# Altium PCB KF01A-D.PcbDoc
Units mm, origin at the board's own origin, x right, y up, seen from the top; angles counter-clockwise.
Board outline 361.19 x 228.47 mm, 2 copper layers (Top Layer, Bottom Layer); 105 components, 48 nets, 423 pads, 0 vias.
Unrouted connection lines stored in the file: 62.
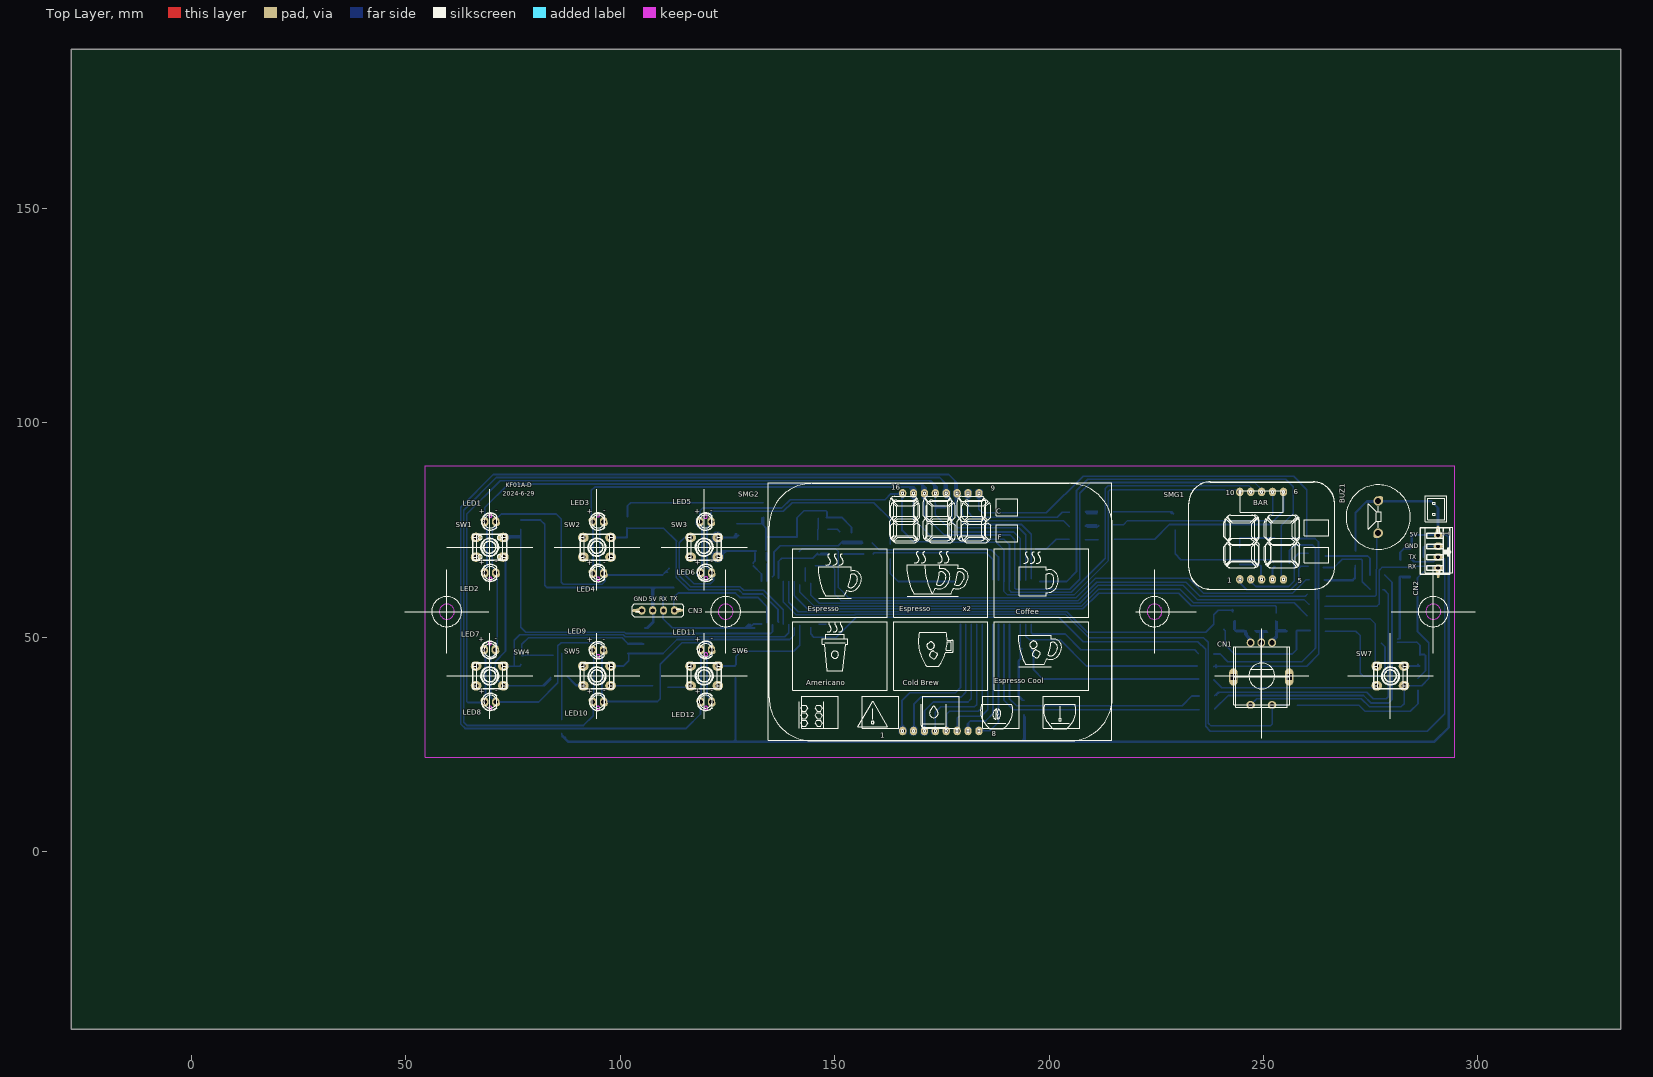
[diagram p0: Top Layer view]
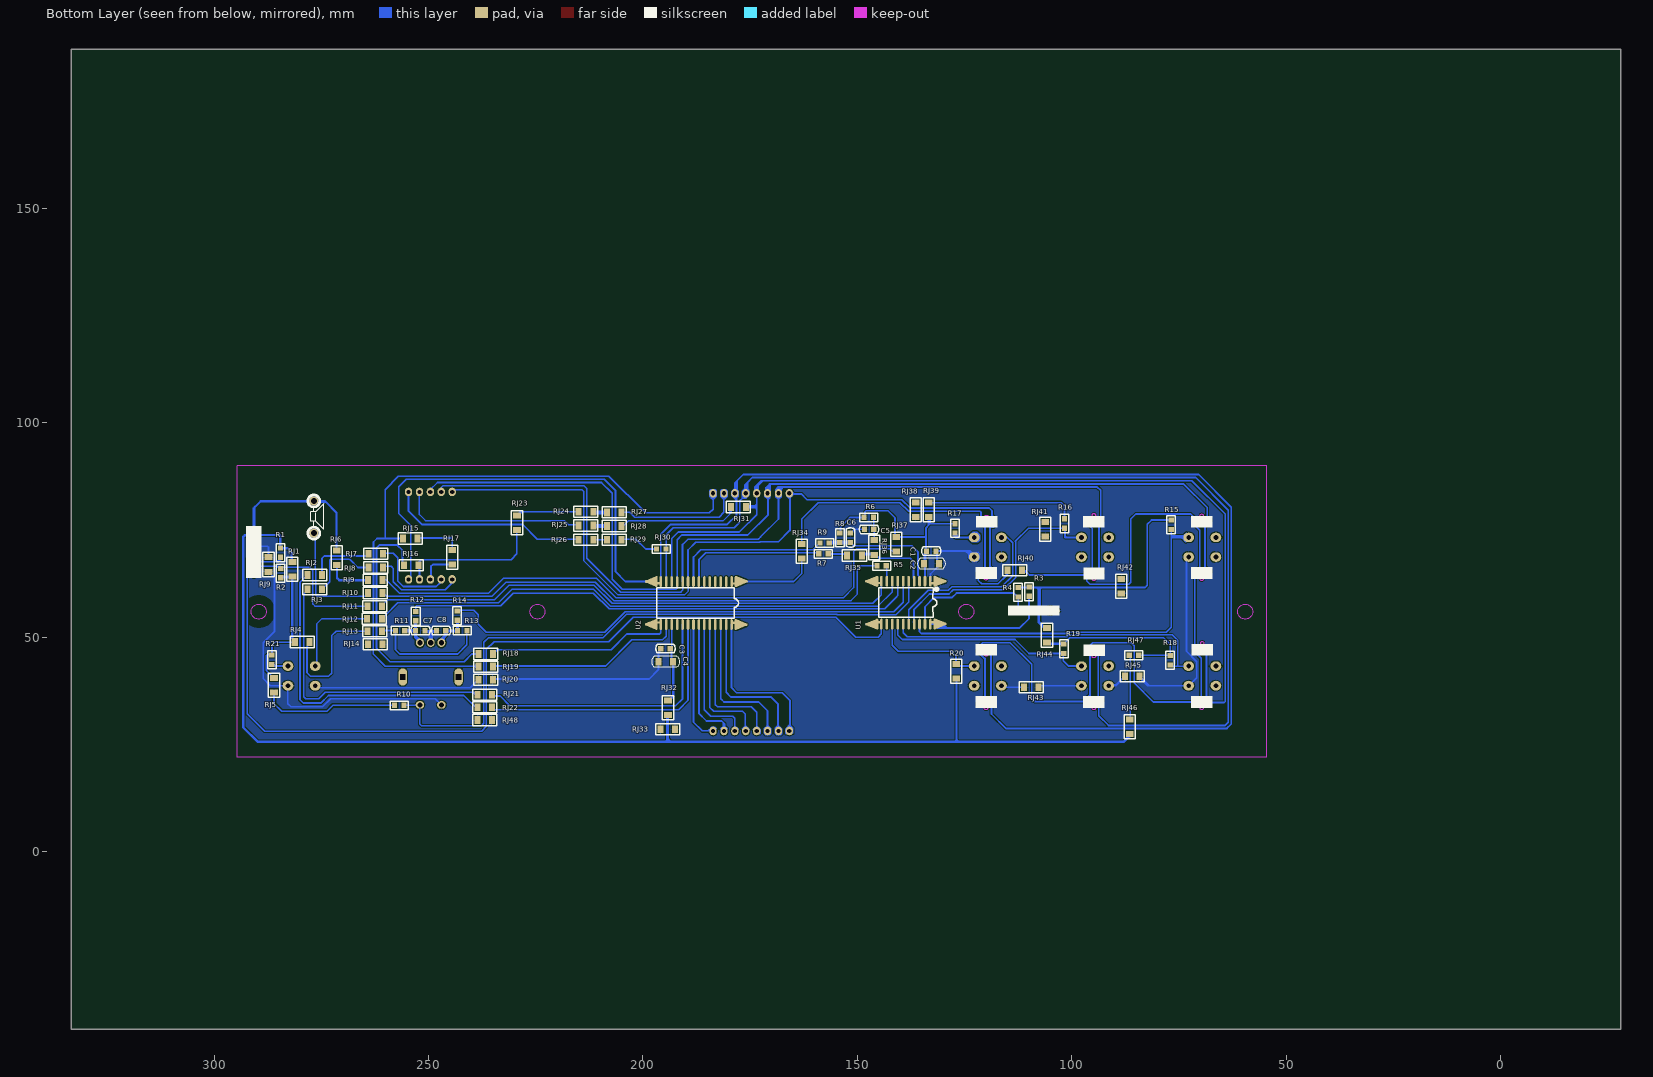
[diagram p1: Bottom Layer view, seen from below]

## Layer stack, top to bottom
Top Solder: solder mask 0.0102, Solder Resist, Dk 3.5
Top Layer: signal copper 0.0356
Dielectric 1: dielectric 0.32, FR-4, Dk 4.8
Bottom Layer: signal copper 0.0356
Bottom Solder: solder mask 0.0102, Solder Resist, Dk 3.5

## Board outline
-27.94,-41.402 333.248,-41.402 333.248,187.071 -27.94,187.071

## Design rules (kind name [scope] priority, off if disabled: settings)
Clearance [All] p1: gap=0.3
PolygonConnect [All] p1: connectstyle=Relief reliefconductorwidth=0.254 reliefentries=4 polygonreliefangle="90 Angle" airgapwidth=0.254
RoutingVias [All] p1: holewidth=0.711 width=1.27 viastyle="Through Hole" minholewidth=0.711 minwidth=1.27 maxholewidth=0.711 maxwidth=1.27
SolderMaskExpansion [All] p1: expansion=0.102
Width [All] p1: maxlimit=2 minlimit=0.3 preferedwidth=0.4 minimp=50.000000 maximp=50.000000 favimp=50.000000
30 further rules are at their usual default settings.

## Classes and differential pairs
component class KF01A-D: BUZ1 C1 C2 C3 C4 C5 C6 C7 CN1 CN2 CN3 LED1 LED2 LED3 LED4 LED5 LED6 LED7 LED8 LED9 LED10 LED11 LED12 R1 R2 R3 R4 R5 R6 R7 R8 R9 R10 R11 R12 R13 R14 R15 R16 R17 R18 R19 R21 SMG1 SMG2 SW1 SW2 SW3 SW4 SW5 SW6 SW7 U1 U2

## Components (designator, comment, footprint, x,y, rotation, side; value= is the part's Value field where it differs from the comment)
BUZ1 "" BUZ-7.5-15-AI 276.733,74.295 r90 top
C1 "104" c0805 131.658,70.103 r0 bottom
C2 "10UF" c1206 132.715,67.183 r0 bottom
C3 "104" c0805 193.634,47.37 r0 bottom
C4 "10UF" c1206 194.691,44.323 r0 bottom
C5 "101" c0805 146.177,75.184 r0 bottom
C6 "101" c0805 151.638,72.136 r90 bottom
C7 "104" c0805 252.984,51.562 r180 bottom
C8 "104" c0805 248.158,51.562 r180 bottom
CN1 "编码器" 编码器 250.19,43.688 r0 top
CN2 "" CN-2.54-4-X 290.703,66.167 r90 top
CN3 "" CN-2.54-4-P 108.697,55.997 r0 top
LED1 "3MM白光" led3#1 68.453,76.962 r0 top
LED2 "3MM白光" led3#2 69.723,65.024 r0 top
LED3 "3MM白光" led3#2 94.869,76.962 r0 top
LED4 "3MM白光" led3#2 94.868,64.897 r0 top
LED5 "3MM白光" led3#2 119.887,76.962 r0 top
LED6 "3MM白光" led3#2 120.014,65.024 r0 top
LED7 "3MM白光" led3#2 69.595,47.117 r0 top
LED8 "3MM白光" led3#2 69.722,34.925 r0 top
LED9 "3MM白光" led3#2 94.82,46.99 r0 top
LED10 "3MM白光" led3#2 94.869,34.925 r0 top
LED11 "3MM白光" led3#2 120.015,47.117 r0 top
LED12 "3MM白光" led3#2 120.015,34.925 r0 top
R1 "10K" R0805 284.48,69.85 r90 bottom
R2 "10K" R0805 284.48,64.897 r270 bottom
R3 "10K" R0805 109.982,60.579 r270 bottom
R4 "10K" R0805 112.522,60.452 r270 bottom
R5 "100R" R0805 144.272,66.675 r180 bottom
R6 "10K" R0805 147.447,77.978 r0 bottom
R7 "1K" R0805 157.988,69.469 r0 bottom
R8 "10K" R0805 154.051,73.279 r90 bottom
R9 "1K" R0805 157.734,72.009 r0 bottom
R10 "10K" R0805 256.921,34.163 r0 bottom
R11 "4.7K" R0805 256.54,51.562 r180 bottom
R12 "1K" R0805 252.984,54.864 r270 bottom
R13 "4.7K" R0805 242.062,51.562 r180 bottom
R14 "1K" R0805 243.35,54.99 r270 bottom
R15 "10K" R0805 76.853,76.158 r270 bottom
R16 "10K" R0805 101.727,76.454 r270 bottom
R17 "10K" R0805 127.254,75.311 r270 bottom
R18 "10K" R0805 77.089,44.577 r270 bottom
R19 "10K" R0805 101.854,47.244 r270 bottom
R20 "0R" r1206 126.975,40.375 r90 bottom
R21 "10K" R0805 286.512,44.704 r270 bottom
RJ1 "0R" r1206 281.725,64.135 r90 bottom
RJ2 "0R" r1206 274.828,64.516 r0 bottom
RJ3 "0R" r1206 278.228,61.214 r180 bottom
RJ4 "0R" r1206 277.778,48.895 r0 bottom
RJ5 "0R" r1206 286.004,37.084 r90 bottom
RJ6 "0R" r1206 271.399,70.231 r270 bottom
RJ7 "0R" r1206 260.604,69.469 r0 bottom
RJ8 "0R" r1206 260.604,66.294 r0 bottom
RJ9 "0R" r1206 287.313,65.278 r90 bottom
RJ9 "0R" r1206 260.731,63.373 r0 bottom
RJ10 "0R" r1206 260.731,60.325 r0 bottom
RJ11 "0R" r1206 260.858,57.277 r0 bottom
RJ12 "0R" r1206 260.887,54.356 r0 bottom
RJ13 "0R" r1206 260.858,51.435 r0 bottom
RJ14 "0R" r1206 264.131,48.387 r180 bottom
RJ15 "0R" r1206 255.905,73.025 r180 bottom
RJ16 "0R" r1206 252.349,66.802 r0 bottom
RJ17 "0R" r1206 244.475,70.358 r270 bottom
RJ18 "0R" r1206 238.379,46.101 r180 bottom
RJ19 "0R" r1206 238.379,43.18 r180 bottom
RJ20 "0R" r1206 238.379,40.132 r180 bottom
RJ21 "0R" r1206 238.55,36.625 r180 bottom
RJ22 "0R" r1206 238.625,33.675 r180 bottom
RJ23 "0R" r1206 229.362,75.057 r90 bottom
RJ24 "0R" r1206 214.982,79.248 r180 bottom
RJ25 "0R" r1206 214.982,76.073 r180 bottom
RJ26 "0R" r1206 214.982,72.771 r180 bottom
RJ27 "0R" r1206 208.378,79.121 r180 bottom
RJ28 "0R" r1206 208.407,75.946 r180 bottom
RJ29 "0R" r1206 208.407,72.771 r180 bottom
RJ30 "1K" R0805 195.834,70.612 r0 bottom (schematic designator R14)
RJ31 "0R" r1206 179.422,80.391 r180 bottom
RJ32 "0R" r1206 194.144,35.306 r270 bottom
RJ33 "0R" r1206 192.532,28.536 r0 bottom
RJ34 "0R" r1206 162.941,68.326 r90 bottom
RJ35 "0R" r1206 148.971,69.088 r0 bottom
RJ36 "0R" r1206 146.05,72.644 r270 bottom
RJ37 "0R" r1206 140.97,69.977 r90 bottom
RJ38 "0R" r1206 136.398,78.007 r90 bottom
RJ39 "0R" r1206 133.35,78.007 r90 bottom
RJ40 "0R" r1206 111.633,65.659 r0 bottom
RJ41 "0R" r1206 106.172,76.933 r270 bottom
RJ42 "0R" r1206 88.475,63.625 r270 bottom
RJ43 "0R" r1206 111.125,38.354 r180 bottom
RJ44 "0R" r1206 105.791,48.768 r90 bottom
RJ45 "0R" r1206 84.201,40.894 r0 bottom
RJ46 "0R" r1206 86.487,30.861 r270 bottom
RJ47 "10K" R0805 85.598,45.847 r0 bottom (schematic designator R18)
RJ48 "0R" r1206 238.608,30.713 r180 bottom
SMG1 "8,8" TH34251AW1-1 244.48,83.889 r0 top
SMG2 "TH80602AWR2-1" TH80602AWR2-1 165.877,83.566 r0 top
SW1 "" KEY-4/4 69.584,71.004 r0 top
SW2 "" KEY-4/4 94.584,71.004 r0 top
SW3 "" KEY-4/4 119.584,71.004 r0 top
SW4 "" KEY-4/4 69.584,41.004 r0 top
SW5 "" KEY-4/4 94.584,41.004 r0 top
SW6 "" KEY-4/4 119.584,41.004 r0 top
SW7 "" KEY-4/4 279.584,41.004 r0 top
U1 "OB38R08T1W20SP" SOP20 132.969,63.086 r0 bottom
U2 "AIP1640" SOP28 179.322,62.996 r0 bottom

## Footprints (in the part's own frame and the unit in brackets; to place one, negate y for a bottom-side part, rotate by r counter-clockwise, add the part's x,y. Pads: shape width x height; smd on the part's side, far side on the other; paste and mask are expansions set on the pad)
BUZ-7.5-15-AI [mm]
  oval 1.3x1.5 all layers, no hole rot 45: 1(-0.44,0.424) 2(7.94,-0.424)
  round 2.2 hole 1.4: 1(0,0) 2(7.5,0)
  silkscreen extent -3.75,-7.5 11.25,7.5
c0805 [mm]
  rect 1.2x1.27 smd: 1(0,0) 2(2.2,-0.001)
  silkscreen extent -1.13,-1 3.37,1
c1206 [mm]
  rect 1.4x1.8 smd: 1(-1.7,0) 2(1.7,0)
  silkscreen extent -3.16,-1.3 3.17,1.3
CN-2.54-4-P [mm]
  oval 1.7x2 hole 1: 1(3.952,0.264) 2(1.412,0.264) 3(-1.128,0.264) 4(-3.668,0.264)
  oval 2.5x0.6 all layers, no hole: 1(4.953,0.28) 4(-4.658,0.247)
  oval 0.6x2.2 all layers, no hole rot 102: 1(5.128,0.095) 4(-4.833,0.432)
  oval 0.6x2.2 all layers, no hole rot 78: 1(5.13,0.469) 4(-4.835,0.058)
  silkscreen extent -5.87,-1.26 6.15,1.78
CN-2.54-4-X [mm]
  oval 1.7x2 hole 1: 1(7.62,0) 4(0,0)
  oval 2.5x0.6 all layers, no hole: 1(8.59,0.016) 4(-1.09,-0.016)
  oval 0.6x2.2 all layers, no hole rot 102: 1(8.765,-0.168) 4(-1.265,0.168)
  oval 0.6x2.2 all layers, no hole rot 78: 1(8.767,0.206) 4(-1.267,-0.206)
  oval 1.7x2.2 hole 1: 2(5.08,0) 3(2.54,0)
  oval 2x2.5 on Top Overlay: 4(0,0)
  silkscreen extent -1.5,-2.97 9.34,4.12
KEY-4/4 [mm]
  oval 2.5x2.2 hole 1.1: 1(-3.175,2.286) 1(3.175,2.286) 2(-3.175,-2.286) 2(3.175,-2.286)
  round 3.2 on Bottom Overlay: 1(-3.175,2.286) 1(3.175,2.286) 2(-3.175,-2.286) 2(3.175,-2.286)
  silkscreen extent -3.94,-3.05 3.94,3.05
led3#1 [mm]
  round 1.3 all layers, no hole: A(-0.333,0.381) K(2.87,-0.381)
  oval 1.7x2.2 hole 1.1: A(0,0) K(2.54,0)
  silkscreen extent -0.73,-2 2.78,2
led3#2 [mm]
  round 1.3 all layers, no hole: A(-1.602,0.381) K(1.602,-0.381)
  oval 1.7x2.2 hole 1.1: A(-1.269,0) K(1.271,0)
  silkscreen extent -2,-2 1.51,2
R0805 [mm]
  rect 1.2x1.27 smd: 1(-1.185,0.018) 2(1.015,0.018)
  silkscreen extent -2.18,-0.98 2.01,1.02
r1206 [mm]
  rect 1.4x1.8 smd: 1(0,0) 2(3.4,0)
  silkscreen extent -1.1,-1.3 4.5,1.3
SOP20 [mm]
  oval 0.6x1 smd: 1(-2.45,-0.01) 1(-1.958,0.011) 10(13.388,-0.011) 10(13.94,0.06) 11(13.388,9.989) 11(13.89,10.02) 20(-2.55,10.01) 20(-1.958,10.011)
  oval 3.2x0.6 smd rot 158: 1(-2.24,-0.45) 10(13.688,0.529) 11(13.688,10.529) 20(-2.258,9.471)
  oval 3.2x0.6 smd rot 22: 1(-2.24,0.52) 10(13.708,-0.471) 11(13.708,9.529) 20(-2.278,10.471)
  oval 0.6x1.8 smd: 1(-1.478,-0.009) 10(12.908,0.009) 11(12.908,10.009) 20(-1.478,9.991)
  oval 2.8x0.5 smd: 1(-1.14,0.47) 10(12.56,0.46) 11(12.57,9.57) 20(-1.18,9.56)
  oval 0.6x2.5 smd: 1(-1.008,0) 1(0,0) 2(1.27,0) 3(2.54,0) 4(3.81,0) 5(5.08,0) 6(6.35,0) 7(7.62,0) 8(8.89,0) 9(10.16,0) 10(11.43,0) 10(12.438,0) 11(11.43,10) 11(12.438,10) 12(10.16,10) 13(8.89,10) 14(7.62,10) 15(6.35,10) 16(5.08,10) 17(3.81,10) 18(2.54,10) 19(1.27,10) 20(-1.008,10) 20(0,10)
  silkscreen extent -1.57,1.56 12,8.45
SOP28 [mm]
  round 1.5 on Bottom Overlay: 0(-1.572,1.996)
  oval 0.6x1 smd: 1(-2.458,0.011) 1(-1.958,0.011) 14(18.482,-0.018) 14(19.015,-0.049) 15(18.476,9.968) 15(19.019,10.007) 28(-2.408,10.061) 28(-1.946,10.015)
  oval 3.2x0.6 smd rot 22: 1(-2.278,0.471) 14(18.735,-0.509) 15(18.739,9.507) 28(-2.218,10.501)
  oval 3.2x0.6 smd rot 158: 1(-2.258,-0.529) 14(18.735,0.461) 15(18.729,10.467) 28(-2.208,9.541)
  oval 0.6x1.8 smd: 1(-1.478,-0.009) 14(18.002,0.002) 15(17.996,9.989) 28(-1.466,9.995)
  oval 2.8x0.5 smd: 1(-1.218,0.421) 14(17.645,0.401) 15(17.629,9.567) 28(-1.138,9.581)
  oval 0.6x2.5 smd: 1(-1.008,0) 1(0,0) 2(1.272,0.004) 3(2.542,0.004) 4(3.812,0.004) 5(5.082,0.004) 6(6.352,0.004) 7(7.622,0.004) 8(8.892,0.004) 9(10.162,0.004) 10(11.432,0.004) 11(12.702,0.004) 12(13.972,0.004) 13(15.242,0.004) 14(16.512,-0.005) 14(17.532,-0.007) 15(16.512,10.004) 15(17.526,9.98) 16(15.242,10.004) 17(13.972,10.004) 18(12.702,10.004) 19(11.432,10.004) 20(10.162,10.004) 21(8.892,10.004) 22(7.622,10.004) 23(6.352,10.004) 24(5.082,10.004) 25(3.812,10.004) 26(2.542,10.004) 27(1.272,10.004) 28(-0.996,10.004) 28(0.008,10.011)
  silkscreen extent -1.63,1.41 17.47,8.6
TH34251AW1-1 [mm]
  oval 1.7x2 hole 1: 1(-0.005,-20.389) 2(2.535,-20.389) 3(5.075,-20.389) 4(7.615,-20.389) 5(10.155,-20.389) 6(10.155,0.011) 7(7.615,0.011) 8(5.075,0.011) 9(2.535,0.011) 10(-0.005,0.011)
  silkscreen extent -11.93,-22.69 22.07,2.31
TH80602AWR2-1 [mm]
  oval 1.7x2 hole 1: 1(-0.015,-55.4) 2(2.525,-55.4) 3(5.065,-55.4) 4(7.605,-55.4) 5(10.145,-55.4) 6(12.685,-55.4) 7(15.225,-55.4) 8(17.765,-55.4) 9(17.765,0) 10(15.225,0) 11(12.685,0) 12(10.145,0) 13(7.605,0) 14(5.065,0) 15(2.525,0) 16(-0.015,0)
  silkscreen extent -31.12,-57.7 48.88,2.3
编码器 [mm]
  oval 2x4 hole 1.2 square: 0(-7.204,-2.937) 0(5.796,-2.937)
  oval 2x1.8 hole 1.2: 1(1.796,-9.437) 2(-3.204,-9.437)
  oval 1.8x2 hole 1.2: 3(1.796,5.063) 4(-0.704,5.063) 5(-3.204,5.063)
  silkscreen extent -7.19,-9.94 5.8,5.06

## Part data
BUZ1: library part BUZ, "BUZ"
C1 C2 C3 C4 C5 C6 C7 C8: library part C, "CAP"
CN1: library part CN5, "CN5"
CN2 CN3: library part CN4, "CN4"
LED1 LED2 LED3 LED4 LED5 LED6 LED7 LED8 LED9 LED10 LED11 LED12: library part DL, "LED"
R1 R2 R3 R4 R5 R6 R7 R8 R9 R10 R11 R12 R13 R14 R15 R16 R17 R18 R19 R21 RJ30 RJ47: library part R, "RES"
SW1 SW2 SW3 SW4 SW5 SW6 SW7: library part KQ, "KEY"
U1: library part IC-20
U2: library part TM1628

## Nets (pads, with @x,y where several pads share a name; then routed paths per layer and width w, separated by ;. In a path a pad name is that pad's centre, name@x,y a point inside that pad or via, vN(x,y) a via of type N, cw(c..) or ccw(c..) an arc to the next point about the centre after c; other vN are vias at no path point)
+5V: BUZ1.2 C1.2 C2.2 C3.1 C4.1 CN2.1 CN3.3 R1.2 R2.2 R3.1 R4.1 R6.2 R8.2 R10.2 R11.1 R13.2 R15.1 R16.1 R17.1 R18.1 R19.1 R20.1 R21.1 RJ1.1 RJ1.2 RJ4.1 RJ4.2 RJ5.1 RJ5.2 RJ6.1 RJ6.2 RJ9.1@260.731,63.373 RJ9.2@264.131,63.373 RJ13.1 RJ13.2 RJ32.1 RJ32.2 RJ37.1 RJ37.2 RJ39.1 RJ39.2 RJ44.1 RJ44.2 RJ46.1 RJ46.2 RJ47.1 RJ47.2 U1.2 U2.17 | length 1208
  Bottom Layer w0.35: RJ46.2@86.425,26.875 87.725,25.575 289.95,25.575 293.275,28.9 293.275,73.525 292.886,73.914 290.957,73.914 290.703,73.914 CN2.1@289.843,73.914 ; RJ37.1@141.732,69.977 142.367,70.612 150.241,70.612 150.876,69.977 150.876,61.595 153.244,59.227 206.293,59.227 210.82,63.754 232.537,63.754 235.966,60.325 256.794,60.325 259.842,63.373 RJ9.1@260.604,63.373 ; RJ9.2@264.541,63.246 270.891,63.246 271.399,63.754 RJ6.2 ; RJ6.1 271.399,79.121 273.826,81.548 ; RJ6.1@271.525,70.1 271.525,79.05 274.023,81.548 ; 273.975,81.725 274.003,81.725 ; BUZ1.2@276.373,81.548 274.225,81.548 274.023,81.548 ; BUZ1.2@276.733,81.788 289.179,81.788 290.446,80.521 ; BUZ1.2@276.733,81.795 274.073,81.795 274.003,81.725 ; BUZ1.2@277.062,81.588 289.163,81.588 ; RJ4.2 285.75,48.895 ; RJ1.2@281.813,68.072 281.813,69.85 282.638,70.675 ; RJ1.2@281.94,67.945 281.94,69.85 282.765,70.675 ; R1.2@284.289,70.675 282.765,70.675 ; R1.2@284.48,71.12 284.48,73.406 ; R1.2 282.828,70.865 282.638,70.675 ; R1.2@284.671,71.183 284.671,73.596 ; 284.734,73.406 285.115,73.787 ; CN2.1@290.446,75.054 290.446,80.321 ; CN2.1@290.576,73.787 285.115,73.787 ; CN2.1@290.687,74.757 CN2.1@289.843,73.914 ; CN2.1@290.708,75.317 290.708,80.259 ; CN2.1@290.871,74.932 290.871,80.096 290.708,80.259 ; 273.826,81.548 274.023,81.548 ; 273.826,81.548 274.003,81.725 ; 274.003,81.725 289.025,81.725 289.163,81.588 ; 282.638,70.675 282.765,70.675 ; 284.48,73.406 284.48,73.787 284.607,73.914 285.242,73.914 ; 284.48,73.406 284.671,73.596 ; 284.671,73.596 284.861,73.787 285.115,73.787 ; 285.115,73.787 285.242,73.914 ; 285.242,73.914 CN2.1@289.843,73.914 ; 289.163,81.588 290.429,80.321 290.446,80.321 ; 290.446,80.321 290.446,80.521 ; 290.446,80.321 290.646,80.321 ; 290.446,80.521 290.646,80.321 ; 290.646,80.321 290.708,80.259
  Bottom Layer w0.4: R15.1 81.407,77.343 82.423,76.327 82.423,62.103 82.931,61.595 107.061,61.595 ; R18.1@77.428,45.762 R18.1 R18.1@77.071,45.829 ; RJ47.1 R18.1@77.071,45.829 ; RJ46.2@86.36,27.559 86.36,27.305 87.245,26.42 ; RJ46.1@86.36,30.861 RJ47.2@86.36,46.228 ; RJ46.2@87.05,26.8 87.245,26.605 87.245,26.42 ; R19.1@101.6,48.768 100.457,49.911 78.613,49.911 77.071,48.369 R18.1@77.071,45.829 ; R16.1@101.727,78.105 101.727,80.645 102.489,81.407 RJ39.2 ; R19.1 R19.1@101.896,48.429 ; RJ44.1@105.156,48.641 102.108,48.641 R19.1@101.896,48.429 ; RJ44.1@105.452,48.429 R19.1@101.896,48.429 ; RJ44.2 106.543,52.168 107.85,53.475 107.85,61.25 108.175,61.575 ; RJ44.2@106.299,52.324 107.569,53.594 CN3.3 ; CN3.3@107.442,56.642 107.442,61.214 ; 107.442,61.468 107.442,61.214 ; CN3.3@107.696,57.171 107.696,61.468 ; R4.1 112.462,61.595 107.696,61.595 ; R20.1@126.873,40.575 126.873,26.162 ; R17.1 133.054,76.496 ; RJ39.1@133.054,77.809 133.054,76.496 ; RJ39.1@133.413,77.915 133.413,76.136 ; C1.2@133.985,70.358 133.985,75.565 133.413,76.136 ; 134.141,73.377 141.238,73.377 141.238,77.865 142.875,79.502 147.955,79.502 148.209,79.248 R6.2@148.209,77.978 ; U1.2 C2.2@134.239,67.183 ; C2.2 C2.2@134.415,67.642 ; R6.2@148.081,77.96 R6.2 151.656,77.96 153.924,75.692 R8.2@153.924,74.422 ; C4.1@192.825,44.475 192.825,36.2 193.719,35.306 RJ32.1 ; C4.1 192.991,44.766 193.25,45.025 C3.1@193.25,47.125 ; C4.1@193.04,44.069 193.04,36.322 RJ32.1@193.675,35.687 ; C3.1@193.294,47.752 U2.17 ; C4.1@193.421,44.831 193.421,47.157 C3.1 ; RJ32.2 194.144,26.289 ; RJ32.2@194.437,31.463 194.437,26.035 ; R13.2@240.793,51.816 241.046,51.563 241.046,48.26 243.205,46.101 256.667,46.101 257.683,47.117 R11.1@257.683,51.562 ; R11.1 RJ13.1@260.84,51.58 ; R10.2 272.27,34.145 273.649,32.766 284.226,32.766 286.004,34.544 RJ5.1 RJ5.1@286.004,37.592 ; RJ9.2@264.131,63.373 270.723,63.373 271.275,63.925 RJ6.2@271.275,66.175 ; RJ13.2@264.385,51.435 271.526,51.435 272.542,50.419 272.542,41.656 273.304,40.894 277.495,40.894 278.319,41.718 278.319,47.817 RJ4.1@277.495,48.641 ; RJ4.2@281.305,49.53 281.725,49.95 ; RJ4.2@281.725,49.696 281.725,49.95 ; RJ4.2@281.813,49.657 RJ1.1@281.813,64.135 ; RJ1.1@281.813,64.164 R2.2@284.197,64.164 ; R2.2@284.226,63.881 282.448,63.881 282.194,64.135 RJ1.1@281.813,64.135 ; 285.75,48.895 286.494,48.151 R21.1 ; RJ5.2 287.782,42.262 287.782,45.72 287.528,45.974 R21.1@286.639,45.974 ; CN2.1@290.718,74.153 290.957,73.914 291.084,73.787 292.608,73.787 293.116,73.279 293.116,29.083 289.814,25.781 194.691,25.781 ; 87.245,26.42 87.884,25.781 126.492,25.781 ; 107.061,61.595 107.442,61.214 ; 107.061,61.595 107.696,61.595 ; 107.442,61.214 107.696,61.468 ; 107.696,61.468 107.696,61.595 ; 126.492,25.781 126.873,26.162 ; 126.492,25.781 126.873,25.781 ; 126.873,25.781 126.873,26.162 ; 126.873,25.781 127.254,25.781 ; 126.873,26.162 127.254,25.781 ; 127.254,25.781 193.548,25.781 ; 133.054,76.496 133.413,76.136 ; C2.2@134.415,67.642 134.112,67.945 134.112,69.85 134.415,69.547 C2.2@134.415,67.642 ; 193.548,25.781 193.802,26.035 ; 193.548,25.781 194.691,25.781 ; 193.802,26.035 194.144,26.035 ; 193.802,26.035 194.056,26.289 194.144,26.289 ; 194.144,26.035 194.144,26.289 ; 194.144,26.035 194.437,26.035 ; 194.144,26.289 194.183,26.289 194.437,26.035 ; 194.437,26.035 194.691,25.781 ; 281.725,49.95 RJ1.1 RJ1.1@281.813,64.135
A: R14.1 U1.6 | length 115.8
  Bottom Layer w0.3: U1.6 139.319,58.166 141.478,56.007 154.499,56.007 154.534,55.972 154.559,55.997 204.094,55.997 208.91,51.181 236.474,51.181 238.379,53.086 238.379,55.245 239.395,56.261 242.57,56.261 ; R14.1@242.824,56.515 242.57,56.261 ; R14.1@242.951,56.007 242.824,56.007 242.57,56.261 ; R14.1@243.078,56.261 242.57,56.261
B: R12.1 U1.7 | length 121.3
  Bottom Layer w0.3: 140.589,59.69 U1.7 ; 140.653,59.627 143.672,56.607 207.864,56.607 ; 207.899,56.642 211.582,60.325 230.251,60.325 233.172,57.404 252.73,57.404 252.984,57.15 R12.1@252.984,55.626
BUZ: R5.2 U1.9 | length 3.1
  Bottom Layer w0.4: U1.9 R5.2@143.129,66.167
COM1: RJ3.1 RJ3.2 RJ8.1 RJ8.2 RJ21.1 RJ21.2 SMG1.1 U2.19 | length 169.4
  Bottom Layer w0.4: U2.19 190.754,35.687 192.405,34.036 231.013,34.036 233.299,36.322 RJ21.2@234.95,36.322 ; RJ21.1@238.633,36.449 239.395,37.211 239.649,37.211 ; RJ21.1@239.014,36.576 239.649,37.211 ; SMG1.1@244.348,62.865 246.126,61.087 256.286,61.087 258.191,62.992 258.191,66.04 258.699,66.548 RJ8.1@260.35,66.548 ; RJ8.2 266.446,66.294 268.351,68.199 272.796,68.199 273.05,67.945 273.05,62.992 RJ3.2 ; RJ3.1@277.876,61.087 278.13,61.087 279.1,60.117 279.1,36.149 278.638,35.687 275.59,35.687 274.066,37.211 239.649,37.211
COM2: RJ2.1 RJ2.2 RJ7.1 RJ7.2 RJ22.1 RJ22.2 SMG1.2 U2.20 | length 172.1
  Bottom Layer w0.4: U2.20 189.484,35.306 191.643,33.147 RJ22.2@234.95,33.147 ; RJ22.1@238.633,33.313 241.769,36.449 273.304,36.449 275.082,34.671 279.146,34.671 279.975,35.5 279.975,47.785 279.978,47.788 279.978,50.002 279.975,50.005 279.975,62.798 RJ2.2@278.257,64.516 ; SMG1.2@247.142,62.865 248.158,61.849 255.905,61.849 257.175,63.119 257.175,68.58 258.191,69.596 RJ7.1@260.35,69.596 ; RJ7.2@264.414,68.961 274.32,68.961 274.828,68.453 RJ2.1
COM3: SMG2.1 U2.28 | length 41.1
  Bottom Layer w0.4: SMG2.1@165.1,27.686 165.1,28.829 165.735,29.464 ; SMG2.1@165.735,28.194 165.735,29.464 ; 166.624,27.559 166.624,28.702 165.735,29.591 ; U2.28@179.33,52.985 179.33,38.233 178.181,37.084 167.513,37.084 165.735,35.306 165.735,29.591 ; 165.735,29.464 165.735,29.591
COM4: SMG2.2 U2.27 | length 40.8
  Bottom Layer w0.4: SMG2.2@168.529,28.575 168.529,29.464 ; 168.656,29.337 169.164,28.829 169.164,27.686 168.783,27.305 167.894,27.305 167.64,27.559 167.64,28.575 168.529,29.464 ; U2.27 180.594,37.211 179.451,36.068 170.053,36.068 168.529,34.544 168.529,29.464
COM5: SMG2.3 U2.26 | length 39.5
  Bottom Layer w0.4: SMG2.3@170.942,28.702 170.942,29.464 ; 171.069,29.337 171.704,28.702 171.704,27.686 171.323,27.305 170.434,27.305 170.18,27.559 170.18,28.702 170.942,29.464 ; U2.26 181.864,35.687 181.102,34.925 172.974,34.925 170.942,32.893 170.942,29.464
COM6: SMG2.4 U2.25 | length 36.1
  Bottom Layer w0.4: 172.72,27.559 172.72,28.575 173.482,29.337 ; SMG2.4@173.482,28.702 173.482,29.21 ; SMG2.4@174.244,28.448 173.482,29.21 ; U2.25 183.134,34.29 182.626,33.782 174.752,33.782 173.482,32.512 173.482,29.337 ; 173.482,29.21 173.482,29.337
COM7: SMG2.5 U2.24 | length 34.9
  Bottom Layer w0.4: SMG2.5@175.26,28.575 176.022,29.337 176.149,29.337 ; SMG2.5@175.514,28.702 176.149,29.337 ; SMG2.5@176.149,28.321 176.149,29.337 ; 176.276,29.21 176.784,28.702 ; U2.24 184.404,33.655 183.515,32.766 176.784,32.766 176.149,32.131 176.149,29.337
COM8: SMG2.6 U2.23 | length 32.6
  Bottom Layer w0.4: SMG2.6@177.8,28.575 178.562,29.337 ; SMG2.6@178.562,28.321 178.562,29.21 ; SMG2.6@179.197,28.575 178.562,29.21 ; U2.23 185.674,33.147 184.15,31.623 179.07,31.623 178.562,31.115 178.562,29.337 ; 178.562,29.21 178.562,29.337
COM9: SMG2.7 U2.22 | length 31.8
  Bottom Layer w0.4: 180.34,28.702 180.975,29.337 ; SMG2.7@180.975,28.321 180.975,29.337 ; 181.864,28.702 181.229,29.337 181.229,30.099 ; U2.22 186.944,32.258 185.166,30.48 181.61,30.48 181.229,30.099 ; 180.975,29.337 180.975,29.845 181.229,30.099
COM10: SMG2.8 U2.21 | length 30.3
  Bottom Layer w0.4: 182.88,28.702 183.134,28.956 184.023,28.956 184.785,28.194 ; SMG2.8@183.896,28.194 184.785,28.194 ; U2.21 188.214,30.226 186.182,28.194 184.785,28.194
COM11: U2.18
COM12: LED1.K LED2.K LED3.K LED4.K LED5.K LED6.K LED7.K LED8.K LED9.K LED10.K LED11.K LED12.K RJ34.1 RJ34.2 RJ40.1 RJ40.2 U2.1 | length 308
  Bottom Layer w0.4: LED8.K@70.358,35.56 69.85,36.068 69.85,45.085 71.196,46.431 LED7.K@71.196,46.736 ; LED8.K@70.993,34.925 81.026,34.925 85.471,39.37 85.471,48.006 86.233,48.768 95.123,48.768 96.012,47.879 LED9.K@96.012,47.498 ; LED2.K@70.993,65.532 70.15,66.375 70.15,74.976 70.993,75.819 70.993,76.962 70.993,77.47 72.263,78.74 85.09,78.74 86.233,77.597 86.233,62.865 86.741,62.357 95.758,62.357 96.52,63.119 96.52,64.262 LED4.K@96.139,64.643 ; 71.325,48.084 LED2.K@71.325,64.643 ; LED4.K@96.012,65.151 95.25,65.913 95.25,75.36 LED3.K@96.471,76.581 ; LED10.K@96.14,35.052 96.14,35.94 95.758,36.322 ; LED4.K@96.469,64.516 109.855,64.516 110.49,65.151 ; LED10.K@96.52,35.052 108.712,35.052 109.347,35.687 109.347,43.688 114.427,48.768 120.777,48.768 121.617,47.928 121.617,46.736 121.617,46.322 120.385,45.091 120.281,45.091 120.25,45.059 120.25,36.341 LED12.K@121.031,35.56 ; LED9.K@96.52,46.609 95.758,45.847 95.758,36.322 ; 97.028,35.306 96.012,36.322 95.758,36.322 ; RJ40.1@111.125,65.151 110.49,65.151 ; RJ40.1@111.379,66.04 110.49,65.151 ; RJ40.2@114.681,65.024 115.316,64.389 ; RJ40.2@115.316,65.405 115.316,64.389 ; LED6.K@121.031,65.532 120.269,66.294 120.269,75.692 121.158,76.581 121.158,76.962 121.158,79.121 121.412,79.375 138.049,79.375 140.081,81.407 159.131,81.407 162.941,77.597 RJ34.2 ; LED6.K@121.285,65.024 121.793,64.516 121.793,63.246 121.034,62.487 117.218,62.487 115.316,64.389 ; RJ34.1 162.941,64.897 164.833,63.005 177.044,63.005 U2.1@177.844,63.005 ; U2.1@176.864,62.985 U2.1@177.364,62.985
COM13: U2.2
COM14: U2.3
COM15: U2.4
COM16: U2.5
DIN: R7.2 U2.7 | length 33.3
  Bottom Layer w0.4: R7.2 159.252,69.7 185.316,69.7 186.944,68.072 U2.7@186.944,63.5
GND: C1.1 C2.1 C3.2 C4.2 C5.2 C6.2 C7.2 C8.1 CN1.2 CN1.4 CN2.2 CN3.4 RJ9.1@287.313,65.278 RJ9.2@287.313,68.678 RJ14.1 RJ14.2 RJ20.1 RJ20.2 RJ33.1 RJ33.2 RJ38.1 RJ38.2 RJ41.1 RJ41.2 RJ42.1 RJ42.2 RJ43.1 RJ43.2 RJ45.1 RJ45.2 RJ48.1 RJ48.2 SW1.2@66.409,68.718 SW1.2@72.759,68.718 SW2.2@91.409,68.718 SW2.2@97.759,68.718 SW3.2@116.409,68.718 SW3.2@122.759,68.718 SW4.2@66.409,38.718 SW4.2@72.759,38.718 SW5.2@91.409,38.718 SW5.2@97.759,38.718 SW6.2@116.409,38.718 SW6.2@122.759,38.718 SW7.2@276.409,38.718 SW7.2@282.759,38.718 U1.1 U2.6 | length 277.4
  Bottom Layer w0.4: SW1.2@73.279,68.453 73.279,46.754 70.866,44.341 70.866,40.612 72.759,38.718 81.898,38.718 ; RJ45.1@83.82,40.259 82.279,38.718 81.898,38.718 ; RJ45.1@83.82,40.64 81.898,38.718 ; RJ45.2 89.52,38.974 ; RJ45.2@88.011,40.64 89.677,38.974 ; SW5.2@90.805,38.735 89.76,38.735 89.52,38.974 ; SW5.2@91.074,38.974 89.677,38.974 ; SW5.2@97.759,38.718 RJ43.2@107.586,38.718 ; RJ43.1 SW6.2@115.57,38.354 ; SW3.2@123.19,68.58 123.952,69.342 ; SW3.2@123.571,69.596 123.634,69.659 ; 123.952,69.215 123.952,68.453 123.19,67.691 122.174,67.691 121.539,68.326 121.539,69.469 121.92,69.85 123.444,69.85 ; 123.952,69.469 123.952,69.595 124.46,70.103 ; C2.1 131.015,67.388 131.445,67.818 C1.1@131.445,69.723 ; C2.1@131.064,66.675 132.969,64.77 U1.1@132.969,63.086 ; C1.1 124.713,70.103 ; C5.2 150.621,75.185 C6.2@151.13,74.676 ; C3.2@195.834,47.117 196.391,46.56 C4.2 196.391,42.467 198.599,40.259 RJ20.2@234.823,40.259 ; RJ20.1 240.26,38.251 SW7.2@275.741,38.251 ; CN1.2 248.423,35.687 272.796,35.687 274.701,33.782 282.067,33.782 282.829,34.544 SW7.2@282.829,38.608 ; C8.1@248.03,51.561 C8.1 ; CN1.4@249.174,49.149 249.174,51.181 ; CN1.4 249.486,51.181 ; CN1.4@249.809,48.768 249.809,51.181 ; C7.2 249.486,51.561 ; C7.2@250.825,51.308 250.698,51.435 249.809,51.435 ; C7.2@250.952,51.181 249.809,51.181 ; SW7.2@282.575,38.735 286.893,38.735 288.544,40.386 288.544,48.768 285.877,51.435 285.877,63.841 RJ9.1@287.313,65.278 ; RJ9.2@287.274,68.707 287.274,70.993 287.528,71.247 CN2.2 ; 89.52,38.974 89.677,38.974 ; 123.444,69.85 123.697,70.103 124.078,70.103 ; 123.444,69.85 123.634,69.659 ; 123.634,69.659 123.952,69.342 ; 123.634,69.659 124.078,70.103 ; 123.952,69.342 124.713,70.103 ; 124.078,70.103 124.46,70.103 ; 124.46,70.103 124.713,70.103 ; C8.1@248.158,51.435 249.174,51.435 ; C8.1@248.158,51.435 C8.1 ; C8.1@248.158,51.435 248.412,51.181 249.174,51.181 ; C8.1 249.174,51.561 ; 249.174,51.181 249.486,51.181 ; 249.174,51.181 249.174,51.435 ; 249.174,51.435 249.174,51.561 ; 249.174,51.435 249.486,51.435 ; 249.174,51.561 249.486,51.561 ; 249.486,51.181 249.809,51.181 ; 249.486,51.181 249.486,51.435 ; 249.486,51.435 249.486,51.561 ; 249.486,51.435 249.809,51.435 ; 249.809,51.181 249.809,51.435
KS: CN1.1 R10.1 U1.5 | length 150.3
  Bottom Layer w0.35: U1.5 138.049,58.166 140.97,55.245 154.656,55.245 154.673,55.227 154.808,55.362 202.57,55.362 202.58,55.372 203.835,55.372 209.296,49.911 236.039,49.911 237.109,48.841 237.109,29.972 237.744,29.337 251.587,29.337 251.986,29.736 CN1.1
  Bottom Layer w0.4: CN1.1@252.113,34.145 R10.1
MCU_CS: C5.1 R6.1 R7.1 RJ35.1 RJ35.2 RJ36.1 RJ36.2 U1.4 | length 28.3
  Bottom Layer w0.4: U1.4@136.906,63.754 136.906,67.691 137.668,68.453 144.907,68.453 RJ36.2@146.05,69.596 ; RJ36.2 RJ36.2@146.46,69.244 ; RJ36.1@146.05,72.771 C5.1@146.05,75.184 ; C5.1 R6.1@146.177,77.724 ; RJ35.1@148.463,69.596 146.812,69.596 RJ36.2@146.46,69.244 ; RJ35.1@148.688,69.244 RJ36.2@146.46,69.244 ; RJ35.2@152.146,69.451 R7.1
MCU_WR: C6.1 R8.1 R9.1 U1.3 | length 37.1
  Bottom Layer w0.4: U1.3@135.509,64.135 135.89,64.516 135.89,69.977 137.287,71.374 150.876,71.374 C6.1 ; C6.1@151.892,71.882 156.337,71.882 156.422,71.967 156.549,71.967 R9.1 ; R9.1@156.464,72.136 C6.1 ; R9.1@156.464,72.39 151.892,72.39 C6.1
NetBUZ1_1: BUZ1.1 R5.1 RJ10.1 RJ10.2 | length 152.6
  Bottom Layer w0.35: R5.1 149.207,66.693 149.987,65.913 149.987,60.071 151.481,58.577 206.812,58.577 211.1,62.865 231.902,62.865 235.204,59.563 259.715,59.563 RJ10.1@260.223,60.071 ; RJ10.2@264.668,59.563 275.971,59.563 276.337,59.929 276.337,65.928 276.352,65.943 276.352,73.077 ; BUZ1.1@275.9,73.725 276.032,73.594 BUZ1.1@276.352,73.273 ; BUZ1.1@276.21,74.407 276.352,74.265 BUZ1.1@276.352,73.273 ; BUZ1.1@276.875,73.6 276.352,73.077 ; 276.352,73.077 BUZ1.1@276.352,73.273
NetC7_1: C7.1 CN1.3 R11.2 R12.2 | length 21.4
  Bottom Layer w0.3: CN1.3@251.968,49.403 252.793,50.228 ; CN1.3 253.238,50.002 C7.1@253.238,51.181 ; CN1.3@252.349,49.403 252.793,49.847 ; C7.1@252.793,51.371 252.793,50.228 ; C7.1@252.857,51.816 252.838,51.835 252.838,53.721 R12.2 ; R12.2@252.984,53.594 C7.1 ; C7.1@253.025,51.394 253.025,50.079 252.793,49.847 ; C7.1@253.238,51.308 255.253,51.308 R11.2 C7.1@253.129,51.58 ; R12.2@253.238,53.721 253.238,51.816 C7.1 ; R11.2@255.143,51.816 253.365,51.816 C7.1@253.129,51.58 ; 252.793,49.847 252.793,50.228 ; C7.1 253.111,51.562 C7.1@253.129,51.58
NetC8_2: C8.2 CN1.5 R13.1 R14.2 | length 22
  Bottom Layer w0.3: R13.1@243.078,51.816 243.078,53.594 243.332,53.848 R14.2 ; R14.2@243.247,53.636 R13.1@243.247,51.731 ; R14.2@243.459,53.848 243.459,51.943 R13.1@243.247,51.731 ; C8.2@245.491,51.308 243.586,51.308 243.459,51.435 243.585,51.561 C8.2 C8.2@245.725,51.328 ; C8.2@245.491,51.689 243.459,51.689 243.35,51.58 R13.1 R13.1@243.247,51.731 ; C8.2@245.618,51.435 C8.2@245.725,51.328 ; C8.2@245.999,51.562 245.999,50.673 ; C8.2@246.189,51.117 246.189,50.482 ; CN1.5@246.38,49.149 246.38,49.911 ; CN1.5 CN1.5@246.986,49.305 ; CN1.5@247.015,49.276 CN1.5@246.986,49.305 ; CN1.5@247.015,49.657 CN1.5@246.986,49.686 ; C8.2@245.725,51.328 245.618,51.221 245.618,50.673 246.38,49.911 ; C8.2@245.725,51.328 245.872,51.181 245.872,50.8 245.999,50.673 ; 245.999,50.673 246.189,50.482 ; 246.189,50.482 CN1.5@246.986,49.686 ; 246.38,49.911 CN1.5@246.986,49.305 ; CN1.5@246.986,49.305 CN1.5@246.986,49.686
RX: CN2.4@290.535,64.902 CN2.4@290.703,66.167 CN2.4@290.719,65.077 CN2.4@290.909,64.9 R2.1 RJ11.1 RJ11.2 U1.10 | length 159.5
  Bottom Layer w0.35: U1.10@144.399,62.611 144.399,59.944 146.416,57.927 207.152,57.927 211.328,62.103 231.267,62.103 234.569,58.801 259.461,58.801 RJ11.1@260.604,57.658 ; RJ11.2 276.479,57.277 276.987,57.785 276.987,65.659 277.622,66.294 283.972,66.294 R2.1@284.226,66.04 ; R2.1@284.462,66.59 285.369,66.59 ; R2.1@284.734,66.04 284.819,66.04 285.369,66.59 ; CN2.4@291.126,66.082 290.919,66.34 290.719,66.59 285.369,66.59
RX1: CN3.2 R3.2 U1.20 | length 34.8
  Bottom Layer w0.4: CN3.2@109.964,56.37 R3.2 ; CN3.2@109.982,56.388 109.982,54.356 112.141,52.197 129.1,52.197 ; U1.20@129.9,53.025 129.9,52.997 129.1,52.197 ; U1.20@130.253,52.975 129.475,52.197 ; U1.20@130.3,53 129.85,52.55 129.85,52.197 ; U1.20@130.425,52.875 130.425,52.772 129.85,52.197 ; U1.20@131.322,52.197 130.122,52.197 ; U1.20@132.969,53.086 131.961,53.086 131.011,53.086 130.122,52.197 ; 129.1,52.197 129.475,52.197 ; 129.475,52.197 129.85,52.197 ; 129.85,52.197 130.122,52.197
SCLK: R9.2 U2.8 | length 36.2
  Bottom Layer w0.4: R9.2 160.34,70.4 186.521,70.4 188.214,68.707 U2.8@188.214,63.373
SEG1: LED5.A LED6.A SMG1.10 SMG2.16 U2.9 | length 194.9
  Bottom Layer w0.35: U2.9 189.484,60.706 190.313,59.877 205.8,59.877 213.741,67.818 213.741,68.072 ; 213.756,68.057 213.741,83.947 214.249,84.455 243.92,84.455 SMG1.10
  Bottom Layer w0.4: LED6.A@118.539,64.976 118.614,65.102 118.694,65.238 118.793,65.405 LED6.A@119.001,66.038 ; 118.618,75.692 118.364,75.692 117.729,76.327 117.729,77.597 118.618,78.486 ; LED5.A@118.618,77.216 118.618,78.486 ; 118.872,66.167 LED6.A@119.001,66.038 ; LED5.A@119.068,76.912 119.068,66.244 ; SMG2.16@165.354,83.439 164.846,83.439 ; SMG2.16@165.481,84.074 164.846,83.439 ; SMG2.16@165.862,83.439 165.735,83.439 165.735,82.55 ; SMG2.16@166.37,82.931 165.735,82.296 ; U2.9 189.484,70.358 187.644,72.198 172.785,72.198 172.72,72.263 168.402,72.263 165.735,74.93 165.735,82.296 ; 118.618,78.486 118.618,79.502 119.253,80.137 137.694,80.137 137.694,80.163 139.638,82.107 161.736,82.107 163.068,83.439 164.846,83.439 ; LED6.A@119.001,66.038 119.068,66.244 ; LED6.A@119.001,66.038 119.507,65.532 119.507,64.516 119.126,64.135 118.237,64.135 117.856,64.516 117.856,65.405 118.745,66.294 118.937,66.264 119.068,66.244 ; 164.846,83.439 165.735,82.55 ; 165.735,82.296 165.735,82.55
SEG2: LED3.A LED4.A SMG1.9 SMG2.15 U2.10 | length 223.6
  Bottom Layer w0.35: U2.10 190.754,60.96 191.187,60.527 205.18,60.527 213.106,68.453 213.106,74.803 ; 213.106,75.057 213.106,74.803 ; SMG1.9 247.015,84.963 246.634,85.344 245.055,85.344 245.024,85.375 243.926,85.375 243.895,85.344 213.741,85.344 213.09,84.693 213.09,74.819 213.106,74.803
  Bottom Layer w0.4: LED3.A@93.267,77.343 93.267,84.25 94.042,85.025 161.072,85.025 161.113,85.066 167.283,85.066 ; LED4.A@93.648,65.483 LED3.A@93.648,77.343 ; SMG2.15@167.767,83.312 167.767,82.804 168.402,82.169 ; SMG2.15@167.791,83.669 167.791,84.431 ; SMG2.15@168.148,84.074 167.791,84.431 ; SMG2.15@168.402,83.82 SMG2.15 168.402,82.169 ; SMG2.15@168.402,84.455 167.791,85.066 ; SMG2.15@168.783,84.328 168.759,84.328 168.021,85.066 ; SMG2.15@169.037,83.312 169.037,82.804 168.402,82.169 ; SMG2.15@169.037,83.82 169.037,84.455 168.426,85.066 168.021,85.066 ; U2.10 190.754,71.628 189.484,72.898 173.075,72.898 172.582,73.391 172.582,73.417 168.402,77.597 168.402,82.169 ; 167.283,85.066 167.791,84.558 ; 167.283,85.066 167.791,85.066 ; 167.791,84.431 167.791,84.558 ; 167.791,84.558 167.791,84.685 ; 167.791,84.558 168.021,84.328 168.148,84.328 167.791,84.685 ; 167.791,84.685 167.791,85.066 ; 167.791,85.066 168.021,85.066
SEG3: LED1.A LED2.A SMG1.8 SMG2.14 U2.11 | length 252.2
  Bottom Layer w0.4: LED2.A@68.326,65.786 68.961,66.421 68.961,75.692 68.453,76.2 68.453,76.962 68.453,80.264 73.914,85.725 160.782,85.725 160.823,85.766 170.053,85.766 ; SMG2.14@170.393,83.734 170.393,85.385 ; SMG2.14@170.434,83.312 170.434,82.55 170.815,82.169 ; 170.434,85.344 170.393,85.385 ; SMG2.14@170.751,84.01 170.751,85.407 ; SMG2.14@170.815,83.312 170.815,82.169 ; SMG2.14@171.069,84.328 171.069,85.09 ; SMG2.14@171.323,83.947 171.323,84.836 171.069,85.09 ; SMG2.14@171.577,83.312 171.577,82.931 170.815,82.169 ; U2.11 192.024,61.468 192.29,61.202 204.839,61.202 207.137,63.5 207.137,79.756 ; U2.11@192.024,63.246 192.024,72.771 190.946,73.849 175.579,73.849 170.815,78.613 170.815,82.169 ; 207.137,82.677 207.137,79.756 ; SMG1.8 249.555,84.455 247.904,86.106 209.677,86.106 207.178,83.607 207.178,79.797 207.137,79.756 ; 170.053,85.766 170.053,85.725 170.393,85.385 ; 170.053,85.766 170.393,85.766 ; 170.393,85.385 170.393,85.766 ; 170.393,85.766 170.751,85.407 ; 170.751,85.407 171.069,85.09
SEG4: LED7.A LED8.A RJ25.1 RJ25.2 RJ28.1 RJ28.2 RJ31.1 RJ31.2 SMG1.7 SMG2.13 U2.12 | length 304.9
  Bottom Layer w0.35: RJ31.1 179.422,79.023 179.705,78.74 ; RJ31.1@179.705,79.883 179.705,78.74 ; RJ28.2@204.724,75.819 203.327,77.216 181.229,77.216 179.705,78.74 ; RJ25.2@211.074,75.565 RJ25.2@211.201,75.692 ; RJ25.2@211.074,76.2 208.661,76.2 RJ28.1 RJ28.1@208.661,75.946 ; RJ25.2@211.582,75.946 RJ25.2@211.455,75.946 ; RJ25.2 RJ25.2@211.455,75.946 ; RJ25.1@215.011,76.2 217.297,76.2 218.313,77.216 250.698,77.216 252.095,78.613 SMG1.7 ; RJ28.1@208.661,75.946 208.915,75.692 RJ25.2@211.201,75.692 ; RJ28.1@208.661,75.946 RJ25.2@211.455,75.946 ; RJ25.2@211.201,75.692 RJ25.2@211.455,75.946
  Bottom Layer w0.4: LED7.A@68.326,46.736 68.58,46.482 68.58,34.998 68.612,35.24 LED8.A@68.63,35.374 ; LED8.A@68.686,34.956 68.707,34.798 64.516,34.798 64.262,35.052 64.262,78.74 72.009,86.487 172.085,86.487 ; SMG2.13@173.101,83.82 173.101,85.471 ; 173.228,85.344 173.101,85.471 ; SMG2.13@173.355,84.074 173.355,85.598 ; SMG2.13@173.482,83.439 173.482,81.026 ; SMG2.13@173.609,84.455 173.609,85.344 ; 173.736,80.772 173.482,81.026 ; SMG2.13@173.863,84.201 173.863,85.09 173.609,85.344 ; RJ31.2@175.641,80.645 173.482,80.645 ; RJ31.2@175.895,80.264 173.863,80.264 ; U2.12@193.294,63.373 193.294,73.025 191.77,74.549 177.546,74.549 173.482,78.613 173.482,79.883 ; 172.085,86.487 173.101,85.471 ; 172.085,86.487 172.466,86.487 173.101,85.852 ; 173.101,85.471 173.101,85.852 ; 173.101,85.852 173.355,85.598 ; 173.355,85.598 173.609,85.344 ; 173.482,79.883 173.863,80.264 ; 173.482,79.883 173.482,80.264 ; 173.482,80.264 173.482,80.645 ; 173.482,80.264 173.863,80.264 ; 173.482,80.645 173.482,81.026
SEG5: LED9.A LED10.A RJ26.1 RJ26.2 RJ29.1 RJ29.2 RJ30.1 RJ30.2 SMG1.6 SMG2.12 U2.13 | length 320.5
  Bottom Layer w0.4: LED9.A@93.218,47.371 93.218,46.355 93.853,45.72 93.853,36.068 LED10.A@93.345,35.56 ; LED10.A@93.726,35.179 93.726,31.75 91.44,29.464 64.262,29.464 63.5,30.226 63.5,79.629 71.12,87.249 174.498,87.249 175.577,86.169 ; 175.514,84.455 175.387,84.328 175.387,83.058 175.958,82.486 176.72,82.486 ; SMG2.12@175.577,83.757 175.577,86.169 ; SMG2.12@175.768,84.074 SMG2.12@175.832,84.138 ; SMG2.12@175.832,84.01 SMG2.12@175.832,84.138 ; SMG2.12@175.895,83.312 176.72,82.486 ; SMG2.12@176.276,84.074 176.276,84.582 ; 176.784,82.55 176.784,84.201 176.403,84.582 176.276,84.582 ; U2.13@194.564,63.373 194.564,73.914 192.913,75.565 178.689,75.565 177.4,76.854 177.4,81.807 176.72,82.486 ; RJ30.2 199.372,70.594 201.676,72.898 RJ29.2@204.724,72.898 ; RJ29.1 RJ26.2@211.455,72.771 ; RJ26.1@215.265,72.898 224.663,72.898 228.092,76.327 251.587,76.327 254.635,79.375 SMG1.6 ; 175.577,86.169 175.832,85.915 ; SMG2.12@175.832,84.138 175.832,85.915 ; SMG2.12@175.832,84.138 176.022,84.328 176.022,85.725 ; 175.832,85.915 176.022,85.725 ; 176.022,85.725 176.276,85.471 176.276,84.582
SEG6: LED11.A LED12.A SMG1.5 SMG2.11 U2.14 | length 394.9
  Bottom Layer w0.4: LED11.A@118.413,47.498 118.413,46.687 118.872,46.228 LED12.A@118.872,35.56 ; LED12.A@118.746,34.925 118.746,32.132 115.378,28.764 63.842,28.764 62.8,29.806 62.8,80.326 70.423,87.949 176.592,87.949 178.054,86.487 ; SMG2.11@178.054,84.328 178.054,86.487 ; 178.308,82.042 179.324,83.058 179.324,83.947 178.562,84.709 ; SMG2.11@178.562,84.455 178.562,84.709 ; SMG2.11@178.816,82.804 178.181,82.169 ; SMG2.11@178.816,83.185 178.181,82.55 ; SMG2.11@178.816,83.566 178.308,84.074 178.308,84.582 ; U2.14@195.834,63.627 195.834,74.041 193.548,76.327 180.34,76.327 178.2,78.467 178.2,82.15 178.181,82.169 ; U2.14@197.804,63.013 198.337,63.013 204.11,63.013 206.375,65.278 206.375,84.201 209.042,86.868 255.143,86.868 256.921,85.09 256.921,78.867 254.127,76.073 254.127,64.008 SMG1.5 ; 178.054,86.487 178.308,86.233 ; 178.181,82.169 178.181,82.55 ; 178.181,82.55 177.8,82.931 177.8,84.074 178.308,84.582 ; 178.308,84.582 178.308,86.233 ; 178.308,86.233 178.562,85.979 178.562,84.709
SEG7: RJ16.1 RJ16.2 RJ18.1 RJ18.2 RJ23.1 RJ23.2 RJ24.1 RJ24.2 RJ27.1 RJ27.2 SMG1.4 SMG2.10 U2.15 | length 196.8
  Bottom Layer w0.3: SMG2.10 181.102,82.55 ; RJ27.2@204.851,79.121 203.073,79.121 201.93,77.978 182.245,77.978 181.102,79.121 181.102,82.169 ; RJ27.1 RJ27.1@208.407,79.121 ; RJ24.2@211.201,78.867 208.915,78.867 RJ27.1@208.661,79.121 ; RJ24.2@211.328,79.121 RJ27.1@208.661,79.121 ; RJ24.2@211.328,79.375 208.661,79.375 RJ27.1@208.407,79.121 ; RJ24.1 228.219,79.248 ; RJ23.2@228.6,78.867 228.219,79.248 ; RJ23.2@229.108,78.74 228.6,79.248 228.219,79.248 ; RJ23.1 229.362,69.469 230.723,68.108 251.678,68.108 RJ16.1@252.349,67.437 ; 180.721,82.55 181.102,82.55 ; 180.721,82.55 180.34,82.931 180.34,84.074 180.721,84.455 181.61,84.455 181.864,84.201 181.864,82.931 181.483,82.55 ; 180.721,82.55 180.975,82.296 ; 180.975,82.296 181.102,82.169 ; 180.975,82.296 181.102,82.296 ; 181.102,82.169 181.102,82.296 ; 181.102,82.296 181.229,82.296 181.483,82.55 ; 181.102,82.296 181.102,82.55 ; 181.102,82.55 181.483,82.55 ; RJ27.1@208.407,79.121 RJ27.1@208.661,79.121
  Bottom Layer w0.4: U2.15@195.834,52.992 195.834,51.054 196.088,50.8 203.708,50.8 207.391,47.117 233.934,47.117 RJ18.2@234.808,46.243 ; RJ18.1 239.903,46.101 241.679,44.325 258.976,44.325 261.931,47.28 261.931,47.301 262.185,47.555 262.133,47.607 262.133,63.495 ; SMG1.4 252.095,65.786 ; RJ16.1@252.476,66.548 252.095,66.167 252.095,65.786 ; RJ16.1@252.73,66.421 252.095,65.786 ; RJ16.2@256.032,67.31 256.032,70.231 257.302,71.501 261.493,71.501 262.116,70.878 262.104,70.866 262.104,62.005
SEG8: RJ15.1 RJ15.2 RJ17.1 RJ17.2 RJ19.1 RJ19.2 SMG1.3 SMG2.9 U2.16 | length 228
  Bottom Layer w0.3: SMG2.9@183.515,82.677 183.578,82.614 SMG2.9@183.642,82.614 ; SMG2.9 SMG2.9@183.642,82.614 ; 260.096,73.025 260.096,84.455 257.033,87.518 207.914,87.518 199.39,78.994 184.531,78.994 183.642,79.883 183.642,82.169 ; 183.388,82.423 183.642,82.169 ; 183.388,82.423 183.642,82.423 ; 183.388,82.423 182.88,82.931 182.88,84.201 183.134,84.455 184.15,84.455 184.404,84.201 184.404,82.804 184.213,82.614 ; 183.642,82.169 183.642,82.423 ; 183.642,82.169 183.769,82.169 184.023,82.423 ; 183.642,82.423 SMG2.9@183.642,82.614 ; 183.642,82.423 184.023,82.423 ; SMG2.9@183.642,82.614 184.213,82.614 ; 184.023,82.423 184.213,82.614
  Bottom Layer w0.4: U2.16 194.564,50.292 195.453,49.403 202.565,49.403 208.661,43.307 RJ19.2@234.569,43.307 ; RJ19.1 238.379,43.251 239.212,43.251 ; RJ19.1@238.887,42.926 239.212,43.251 ; RJ19.1@238.901,43.561 239.212,43.251 ; RJ17.2 249.018,66.958 249.428,66.548 SMG1.3@249.428,64.008 ; RJ17.1@244.475,70.993 244.475,73.152 RJ15.2@252.603,73.152 ; RJ15.1@256.413,73.025 260.096,73.025 262.001,73.025 262.816,72.21 262.816,70.588 262.804,70.576 262.804,64.509 262.833,64.48 262.833,58.858 ; 262.89,59.161 262.89,46.101 260.04,43.251 239.212,43.251
SW1: R15.2 SW1.1@66.409,73.29 SW1.1@72.759,73.29 U1.18 | length 93
  Bottom Layer w0.4: SW1.1@72.759,73.29 76.824,73.29 ; SW1.1@73.279,74.295 73.914,73.66 76.835,73.66 ; 73.406,72.263 74.295,73.152 ; R15.2 76.835,73.66 ; U1.18@135.509,52.959 135.509,51.308 135.101,50.9 101.306,50.9 100.995,51.211 77.948,51.211 76.835,52.324 76.835,73.66
SW2: R16.2 SW2.1@91.409,73.29 SW2.1@97.759,73.29 U1.17 | length 57.5
  Bottom Layer w0.4: SW2.1@97.759,73.29 101.219,73.29 ; R16.2@101.589,75.554 101.589,73.66 ; R16.2 110.108,75.439 113.17,72.377 113.092,72.299 113.092,63.946 115.951,61.087 127.661,61.087 128.648,60.1 133.194,60.1 136.779,56.515 136.779,53.721 U1.17@136.906,53.594 ; 101.219,73.29 101.589,73.66 ; 101.219,73.29 101.589,73.29 101.589,73.66
SW3: R17.2 SW3.1@116.409,73.29 SW3.1@122.759,73.29 U1.16 | length 57.1
  Bottom Layer w0.4: SW3.1@116.205,73.406 115.189,73.406 113.792,72.009 113.792,64.389 116.394,61.787 127.951,61.787 128.778,60.96 133.477,60.96 138.049,56.388 U1.16 ; SW3.1@122.759,73.29 124.206,73.29 ; 124.206,73.279 123.19,72.263 121.92,72.263 121.539,72.644 121.539,73.914 122.047,74.422 123.074,74.422 124.206,73.29 ; R17.2@126.873,74.168 R17.2@126.873,73.798 ; R17.2@127,73.914 126.989,73.914 R17.2@126.873,73.798 ; R17.2@127.116,74.157 127.116,73.29 ; R17.2@127.635,73.81 127.116,73.29 ; 124.206,73.29 126.365,73.29 ; 126.365,73.29 R17.2@126.873,73.798 ; 126.365,73.29 126.873,73.29 ; 126.873,73.29 127.116,73.29 ; 126.873,73.29 R17.2@126.873,73.798
SW4: R18.2 SW4.1@66.409,43.29 SW4.1@72.759,43.29 U1.15 | length 77.5
  Bottom Layer w0.3: SW4.1@72.759,43.29 76.564,43.29 R18.2@76.962,43.688 ; 75.311,43.307 75.311,49.276 76.596,50.561 100.726,50.561 101.137,50.15 138.415,50.15 139.319,51.054 U1.15
SW5: R19.2 SW5.1@91.409,43.29 SW5.1@97.759,43.29 U1.14 | length 48.6
  Bottom Layer w0.4: SW5.1@97.759,43.29 100.694,43.29 101.981,44.577 R19.2@101.981,46.228 ; R19.2 109.983,46.229 113.254,49.5 139.543,49.5 140.589,50.546 U1.14@140.589,52.197
SW6: R20.2 SW6.1@116.409,43.29 SW6.1@122.759,43.29 U1.13 | length 26.8
  Bottom Layer w0.4: SW6.1@122.759,43.29 R20.2@126.856,43.29 ; R20.2@126.873,43.561 127,43.688 127,45.593 128.143,46.736 140.462,46.736 141.859,48.133 U1.13@141.859,52.832
SW7: R21.2 RJ12.1 RJ12.2 SW7.1@276.409,43.29 SW7.1@282.759,43.29 U1.8 | length 151.8
  Bottom Layer w0.35: U1.8@141.859,62.23 141.859,60.579 145.161,57.277 207.615,57.277 ; 207.645,57.277 207.615,57.277 ; 260.159,55.054 257.16,58.054 233.665,58.054 230.505,61.214 211.552,61.214 207.615,57.277 ; RJ12.2 274.828,54.356 276.098,53.086 276.098,44.196 SW7.1@276.733,43.561
  Bottom Layer w0.4: SW7.1@282.759,43.29 285.623,43.29 ; R21.2@286.004,43.688 286.004,43.671 285.623,43.29 ; R21.2@286.368,43.29 285.623,43.29
TX: CN2.3 R1.1 U1.11 | length 224.3
  Bottom Layer w0.3: U1.11@144.399,52.324 144.399,50.8 145.161,50.038 150.368,50.038 155.067,54.737 202.311,54.737 208.026,49.022 234.696,49.022 236.474,47.244 236.474,29.21 237.617,28.067 288.163,28.067 292.227,32.131 292.227,68.199 ; U1.11@146.357,53.097 U1.11@148.093,53.097 ; R1.1@284.226,68.326 284.861,67.691 ; R1.1@284.48,68.326 284.861,67.945 ; R1.1@284.861,68.326 284.861,67.945 ; CN2.3@290.576,68.199 290.871,68.33 291.719,68.707 292.227,68.199 ; CN2.3 289.56,67.564 285.242,67.564 ; CN2.3@291.719,68.58 292.1,68.199 292.227,68.199 ; 284.861,67.691 284.861,67.945 ; 284.861,67.691 284.988,67.564 285.242,67.564 ; 284.861,67.945 285.242,67.564
TX1: CN3.1 R4.2 U1.19 | length 29.9
  Bottom Layer w0.4: CN3.1@112.504,56.533 R4.2 ; R4.2@112.649,59.436 113.538,60.325 126.873,60.325 127.889,59.309 132.08,59.309 134.239,57.15 U1.19@134.239,53.467
pads on no net: CN1.0 CN2.4@290.703,66.167 SW1.1@66.409,73.29 SW1.1@72.759,73.29 SW1.2@66.409,68.718 SW1.2@72.759,68.718 SW2.1@91.409,73.29 SW2.1@97.759,73.29 SW2.2@91.409,68.718 SW2.2@97.759,68.718 SW3.1@116.409,73.29 SW3.1@122.759,73.29 SW3.2@116.409,68.718 SW3.2@122.759,68.718 SW4.1@66.409,43.29 SW4.1@72.759,43.29 SW4.2@66.409,38.718 SW4.2@72.759,38.718 SW5.1@91.409,43.29 SW5.1@97.759,43.29 SW5.2@91.409,38.718 SW5.2@97.759,38.718 SW6.1@116.409,43.29 SW6.1@122.759,43.29 SW6.2@116.409,38.718 SW6.2@122.759,38.718 SW7.1@276.409,43.29 SW7.1@282.759,43.29 SW7.2@276.409,38.718 SW7.2@282.759,38.718 U1.12 U2.0

## Polygon pours and split planes (outlines as drawn)
GND on Bottom Layer "Keep-Out Layer-No Net" (solid, remove dead copper, pour order 6): 46.228,98.298 51.435,103.505 295.529,103.505 295.529,18.415 304.546,9.398 300.482,13.462 52.705,13.462 52.705,97.409 43.307,106.807

## Keep-outs
Keep-Out Layer:
  circle w0.1: c120,46.025 r0.4
  circle w0.127: c289.584,56.004 r1.75
  circle w0.127: c224.584,56.004 r1.75
  circle w0.127: c124.584,56.004 r1.75
  circle w0.127: c59.584,56.004 r1.75
  circle w0.1: c94.869,33.528 r0.4
  circle w0.1: c94.869,45.593 r0.4
  circle w0.1: c69.596,48.641 r0.4
  circle w0.1: c69.723,33.528 r0.4
  circle w0.1: c69.723,63.627 r0.4
  circle w0.1: c69.723,78.359 r0.4
  circle w0.1: c94.869,78.486 r0.4
  circle w0.1: c94.869,63.627 r0.4
  circle w0.1: c119.888,78.105 r0.4
  circle w0.1: c120.015,63.754 r0.4
  circle w0.1: c120.015,33.528 r0.4
  lines w0.127: 294.584,22.004 54.584,22.004 54.584,24.004 54.584,25.004 54.584,87.004 54.584,89.004 54.584,90.004 294.584,90.004 ; 294.584,22.013 294.584,24.004 ; 294.584,24.003 294.584,25.004 294.584,87.004 294.584,89.004 294.584,90

## Silkscreen, mask and mechanical layers (free items; w line width, h text height)
Top Overlay:
  drawing of 1104 lines, arcs and shapes, not listed
  text "KF01A-D" at 73.3,84.975 h1
  text "2024-6-29" at 72.675,83 h1
  text "BAR" at 247.65,80.772 h1.2
  text "C" at 187.69,78.755 h1.2
  text "5V" at 284.099,73.406 h1
  text "F" at 188.043,72.714 h1.2
  text "GND" at 282.956,70.739 h1
  text "TX" at 283.845,68.199 h1
  text "RX" at 283.718,66.04 h1
  text "TX" at 111.633,58.547 h1
  text "GND" at 103.124,58.42 h1
  text "5V" at 106.68,58.42 h1
  text "RX" at 109.093,58.42 h1
  text "Espresso" at 143.762,56.129 h1.2
  text "Espresso" at 165.094,56.129 h1.2
  text "x2" at 179.93,56.07 h1.2
  text "Coffee" at 192.251,55.329 h1.2
  text "Espresso Cool" at 187.217,39.328 h1.2
  text "Americano" at 143.406,38.864 h1.2
  text "Cold Brew" at 165.93,38.864 h1.2

## Text inside footprints (layer, text, board x,y; h text height)
CN2: Top Overlay "1" at 293.19,73.643 h1.2 r90
LED1: Top Overlay "-" at 71.453,79.874 h1.2 r180; Top Overlay "+" at 68.453,79.874 h1.2 r180
LED2: Top Overlay "-" at 71.454,67.936 h1.2 r180; Top Overlay "+" at 68.454,67.936 h1.2 r180
LED3: Top Overlay "-" at 96.6,79.874 h1.2 r180; Top Overlay "+" at 93.6,79.874 h1.2 r180
LED4: Top Overlay "-" at 96.599,67.809 h1.2 r180; Top Overlay "+" at 93.599,67.809 h1.2 r180
LED5: Top Overlay "-" at 121.618,79.874 h1.2 r180; Top Overlay "+" at 118.618,79.874 h1.2 r180
LED6: Top Overlay "-" at 121.745,67.936 h1.2 r180; Top Overlay "+" at 118.745,67.936 h1.2 r180
LED7: Top Overlay "-" at 71.326,50.029 h1.2 r180; Top Overlay "+" at 68.326,50.029 h1.2 r180
LED8: Top Overlay "-" at 71.453,37.837 h1.2 r180; Top Overlay "+" at 68.453,37.837 h1.2 r180
LED9: Top Overlay "-" at 96.551,49.902 h1.2 r180; Top Overlay "+" at 93.551,49.902 h1.2 r180
LED10: Top Overlay "-" at 96.6,37.837 h1.2 r180; Top Overlay "+" at 93.6,37.837 h1.2 r180
LED11: Top Overlay "-" at 121.746,50.029 h1.2 r180; Top Overlay "+" at 118.746,50.029 h1.2 r180
LED12: Top Overlay "-" at 121.746,37.837 h1.2 r180; Top Overlay "+" at 118.746,37.837 h1.2 r180
SMG1: Top Overlay "1" at 241.555,62.714 h1.2; Top Overlay "5" at 257.93,62.664 h1.2; Top Overlay "6" at 257.005,83.314 h1.2; Top Overlay "10" at 241.18,83.164 h1.2
SMG2: Top Overlay "1" at 160.659,26.554 h1.2; Top Overlay "8" at 186.634,26.929 h1.2; Top Overlay "9" at 186.459,84.229 h1.2; Top Overlay "16" at 163.184,84.379 h1.2